# Altium PCB cover1.PcbDoc
Units mil, origin at the board's own origin, x right, y up, seen from the top; angles counter-clockwise.
Board outline 7500 x 2300 mil, 2 copper layers (Top Layer, Bottom Layer); 34 components, 23 nets, 169 pads, 36 vias.
Unrouted connection lines stored in the file: 1.
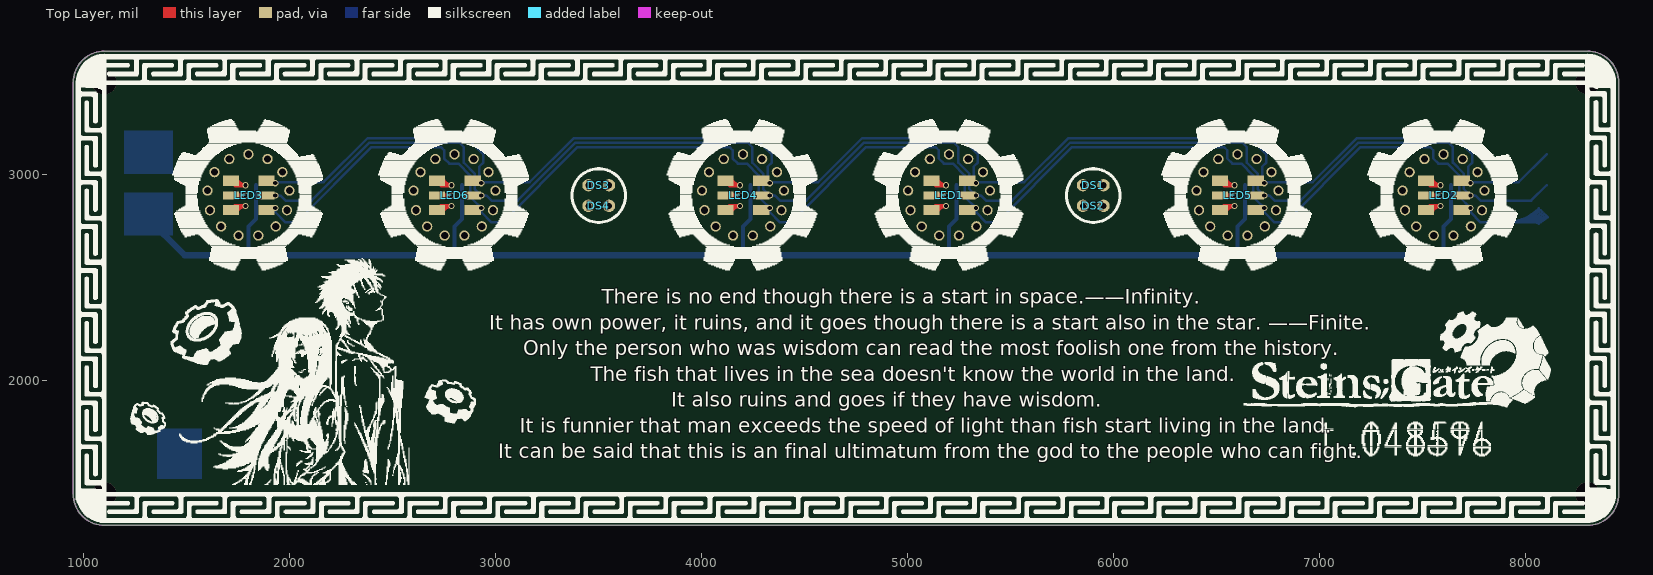
[diagram p0: Top Layer view]
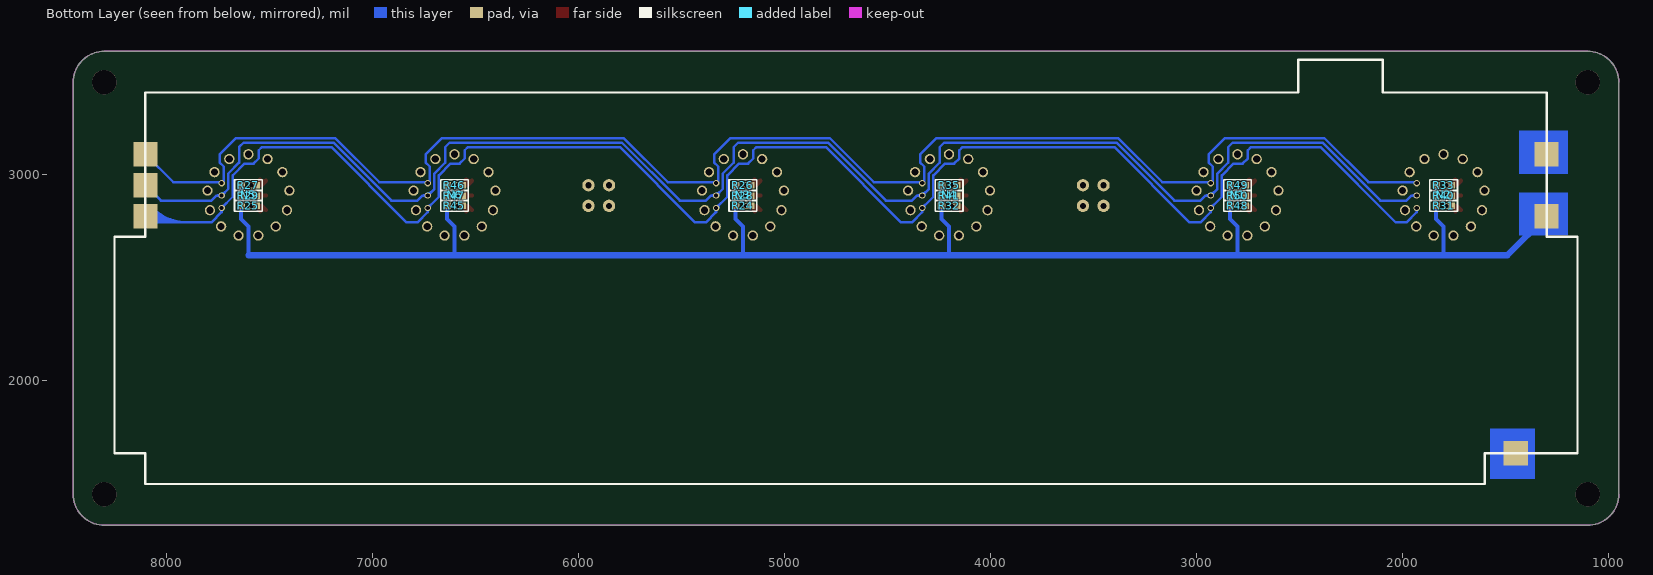
[diagram p1: Bottom Layer view, seen from below]
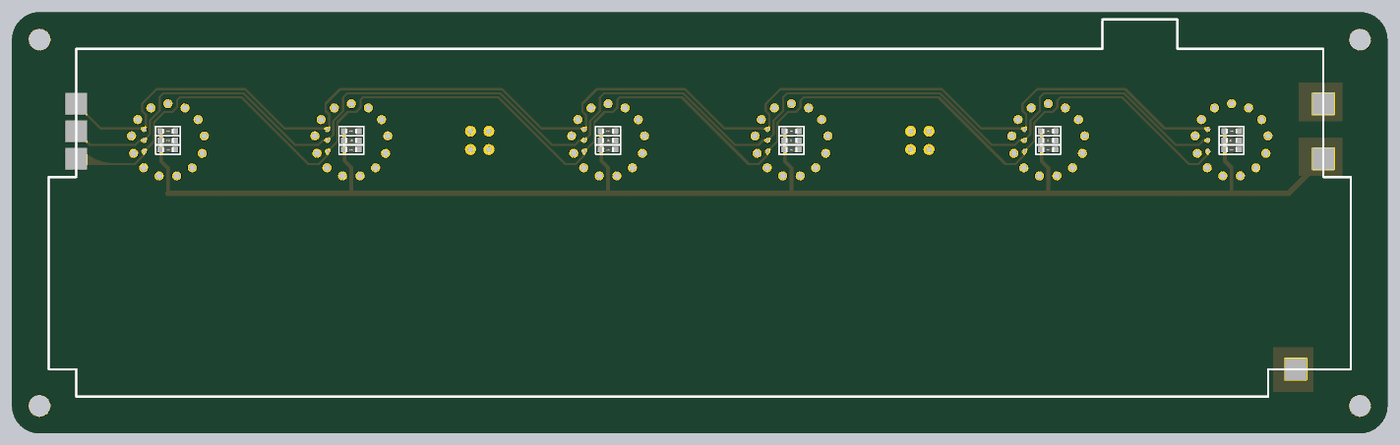
[diagram p2: 3D render of the assembled board from below, using the file's embedded part models]

## Layer stack, top to bottom
Top Solder: solder mask 0.4, Solder Resist, Dk 3.5
Top Layer: signal copper 1.4
Dielectric 1: dielectric 12.6, FR-4, Dk 4.8
Bottom Layer: signal copper 1.4
Bottom Solder: solder mask 0.4, Solder Resist, Dk 3.5

## Board outline
1100,1300 cw(c1100,1450) 950,1450 950,3450 cw(c1100,3450) 1100,3600 8300,3600 cw(c8300,3450) 8450,3450 8450,1450 cw(c8300,1450) 8300,1300

## Design rules (kind name [scope] priority, off if disabled: settings)
Clearance [All] p1: gap=20
PolygonConnect [All] p1: connectstyle=Relief reliefconductorwidth=10 reliefentries=4 polygonreliefangle="90 Angle" airgapwidth=10
RoutingVias [All] p1: holewidth=28 width=50 viastyle="Through Hole" minholewidth=28 minwidth=50 maxholewidth=28 maxwidth=50
SolderMaskExpansion [All] p1: expansion=4
Width [All] p1: maxlimit=100 minlimit=10 preferedwidth=10
29 further rules are at their usual default settings.

## Components (designator, comment, footprint, x,y, rotation, side; value= is the part's Value field where it differs from the comment)
DS1 "Lamp Neon" LED_PIN2 5850,2950 r0 top
DS2 "Lamp Neon" LED_PIN2 5850,2850 r0 top
DS3 "Lamp Neon" LED_PIN2 3550,2950 r180 top
DS4 "Lamp Neon" LED_PIN2 3550,2850 r180 top
LED1 "LED_RGB_5050" LED_RGB_5050 5115,2830 r90 top
LED2 "LED_RGB_5050" LED_RGB_5050 7515,2830 r90 top
LED3 "LED_RGB_5050" LED_RGB_5050 1715,2830 r90 top
LED4 "LED_RGB_5050" LED_RGB_5050 4115,2830 r90 top
LED5 "LED_RGB_5050" LED_RGB_5050 6515,2830 r90 top
LED6 "LED_RGB_5050" LED_RGB_5050 2715,2830 r90 top
N1 "ИН-14" IN14 2800,2900 r0 bottom
N2 "ИН-14" IN14 1800,2900 r0 bottom
N3 "ИН-14" IN14 5200,2900 r0 bottom
N4 "ИН-14" IN14 4200,2900 r0 bottom
N5 "ИН-14" IN14 7600,2900 r0 bottom
N6 "ИН-14" IN14 6600,2900 r0 bottom
R24 "Res2" "R 0603" 5200,2850 r0 bottom
R25 "Res2" "R 0603" 7600,2850 r0 bottom
R26 "Res2" "R 0603" 5200,2950 r0 bottom
R27 "Res2" "R 0603" 7600,2950 r0 bottom
R28 "Res2" "R 0603" 5200,2900 r0 bottom
R29 "Res2" "R 0603" 7600,2900 r0 bottom
R31 "Res2" "R 0603" 1800,2850 r0 bottom
R32 "Res2" "R 0603" 4200,2850 r0 bottom
R33 "Res2" "R 0603" 1800,2950 r0 bottom
R35 "Res2" "R 0603" 4200,2950 r0 bottom
R40 "Res2" "R 0603" 1800,2900 r0 bottom
R41 "Res2" "R 0603" 4200,2900 r0 bottom
R45 "Res2" "R 0603" 6600,2850 r0 bottom
R46 "Res2" "R 0603" 6600,2950 r0 bottom
R47 "Res2" "R 0603" 6600,2900 r0 bottom
R48 "Res2" "R 0603" 2800,2850 r0 bottom
R49 "Res2" "R 0603" 2800,2950 r0 bottom
R50 "Res2" "R 0603" 2800,2900 r0 bottom

## Footprints (in the part's own frame and the unit in brackets; to place one, negate y for a bottom-side part, rotate by r counter-clockwise, add the part's x,y. Pads: shape width x height; smd on the part's side, far side on the other; paste and mask are expansions set on the pad)
IN14 [mil]
  round 50 hole 35: 1(0,-200) 2(-93.03,-177.05) 3(-164.65,-113.54) 4(-198.55,-24.03) 5(-186.98,70.99) 6(-132.58,149.74) 7(-47.81,194.2) 8(47.91,194.18) 9(132.65,149.68) 10(187.01,70.89) 11(198.54,-24.13) 12(164.59,-113.63) 13(92.94,-177.09)
LED_PIN2 [mil] "Photosensitive Diode; 2 Leads"
  round 60 hole 30: 1(0,0) 2(100,0)
LED_RGB_5050 [mm]
  rect 1.27x2 smd: 0(0,0) 1(3.6,0) 3(0,-4.4) 4(3.6,-4.4)
  rect 1x2 smd: 2(1.778,0) 5(1.778,-4.4)
"R 0603" [mil] "1/10W贴片电阻"
  rect 40x31.5 smd: 1(-36.5,0) 2(36.5,0)
  silkscreen extent -68,-26 68,26, body extent -31,-16 31,16, height 16

## Part data
DS1 DS2 DS3 DS4: "Neon Lamp"
R24 R25 R26 R27 R28 R29 R31 R32 R33 R35 R40 R41 R45 R46 R47 R48 R49 R50: "Resistor"

## Free pads (board coordinates)
  round 118.11 hole 118.11: 0(1100,1450) 0(1100,3450) 0(8300,1450) 0(8300,3450)
  rect 118.11x118.11 smd far side: 0(8100,3100) 1(8100,2950) 2(8100,2800) 3(1300,3100) 4(1300,2800) 5(1450,1650)
  rect 118.11x118.11 on Bottom Solder: 5(1450,1650)

## Via types
v1: diameter 30, hole 20, Top Layer to Bottom Layer, 36 vias

## Nets (pads, with @x,y where several pads share a name; then routed paths per layer and width w, separated by ;. In a path a pad name is that pad's centre, name@x,y a point inside that pad or via, vN(x,y) a via of type N, cw(c..) or ccw(c..) an arc to the next point about the centre after c; other vN are vias at no path point)
5V: pad.4 R24.2 R25.2 R26.2 R27.2 R28.2 R29.2 R31.2 R32.2 R33.2 R35.2 R40.2 R41.2 R45.2 R46.2 R47.2 R48.2 R49.2 R50.2 | length 8509.4
  Bottom Layer w20: 1800,2610 1800,2750 1836.5,2786.5 R31.2 R40.2 R33.2 ; 2800,2610 2800,2750 2836.5,2786.5 R48.2 R50.2 R49.2 ; 4200,2610 4200,2750 4236.5,2786.5 R32.2 R41.2 R35.2 ; 5200,2610 5200,2750 5236.5,2786.5 R24.2 R28.2 R26.2 ; 6600,2610 6600,2750 6636.5,2786.5 R45.2 R47.2 R46.2 ; 7600,2610 7600,2750 7636.5,2786.5 R25.2 R29.2 R27.2
  Bottom Layer w30: pad.4 1490,2610 7600,2610
GND: pad.3 pad.5@1450,1650
LED_B: LED1.3 LED2.3 LED3.3 LED4.3 LED5.3 LED6.3 pad.2 | length 10835.3
  Bottom Layer w12: v1(1930,2840) 1930,2820 ; v1@2921,2840.07 ccw(c2899.85,2840.24) 2914.63,2855.37 ; v1@2921,2840.1 ccw(c2900.14,2840.35) 2915.06,2854.93 ccw(c2929.65,2869.86) v1@2929.9,2849 ; v1@2929.93,2849 cw(c2929.76,2870.15) 2914.63,2855.37 ; v1@4321,2840.07 ccw(c4299.85,2840.24) 4314.63,2855.37 ; v1@4321,2840.1 ccw(c4300.14,2840.35) 4315.06,2854.93 ccw(c4329.65,2869.86) v1@4329.9,2849 ; v1@4329.93,2849 cw(c4329.76,2870.15) 4314.63,2855.37 ; v1@5321,2840.07 ccw(c5299.85,2840.24) 5314.63,2855.37 ; v1@5321,2840.1 ccw(c5300.14,2840.35) 5315.06,2854.93 ccw(c5329.65,2869.86) v1@5329.9,2849 ; v1@5329.93,2849 cw(c5329.76,2870.15) 5314.63,2855.37 ; v1@6721,2840.07 ccw(c6699.85,2840.24) 6714.63,2855.37 ; v1@6721,2840.1 ccw(c6700.14,2840.35) 6715.06,2854.93 ccw(c6729.65,2869.86) v1@6729.9,2849 ; v1@6729.93,2849 cw(c6729.76,2870.15) 6714.63,2855.37 ; v1@7721,2840.07 ccw(c7699.85,2840.24) 7714.63,2855.37 ; v1@7721,2840.1 ccw(c7700.14,2840.35) 7715.06,2854.93 ccw(c7729.65,2869.86) v1@7729.9,2849 ; v1@7729.93,2849 cw(c7729.76,2870.15) 7714.63,2855.37 ; 8031.81,2779.65 ccw(c8016.43,2806.28) pad.2@8047.09,2803.98 ; 8033.99,2793.36 ccw(c8017.63,2820.72) pad.2@8048.55,2812.94 ; pad.2 8070,2770 7780,2770 7730,2820 ; 1930,2820 ccw(c1912.28,2820) 1924.03,2833.26 cw(c1912.28,2820) 1930,2820 ; 1930,2820 cw(c1947.72,2820) 1935.97,2833.26 ccw(c1947.72,2820) 1930,2820 ; 1930,2820 1980,2770 2032.23,2770 2397.23,3135 2735,3135 2750,3120 2750,3080 2775,3055 2818.89,3055 2876,2997.89 2876,2894 v1(2930,2840) 2930,2820 ; 2914.64,2855.36 ccw(c2930,2870.73) 2930,2849 cw(c2930,2870.73) 2914.64,2855.36 ; 2914.64,2855.36 cw(c2899.27,2840) 2921,2840 ccw(c2899.27,2840) 2914.64,2855.36 ; 2930,2820 ccw(c2912.28,2820) 2924.03,2833.26 cw(c2912.28,2820) 2930,2820 ; 2930,2820 cw(c2947.72,2820) 2935.97,2833.26 ccw(c2947.72,2820) 2930,2820 ; 2930,2820 2980,2770 3032.23,2770 3397.23,3135 4135,3135 4150,3120 4150,3080 4175,3055 4218.89,3055 4276,2997.89 4276,2894 v1(4330,2840) 4330,2820 ; 4314.64,2855.36 ccw(c4330,2870.73) 4330,2849 cw(c4330,2870.73) 4314.64,2855.36 ; 4314.64,2855.36 cw(c4299.27,2840) 4321,2840 ccw(c4299.27,2840) 4314.64,2855.36 ; 4330,2820 ccw(c4312.28,2820) 4324.03,2833.26 cw(c4312.28,2820) 4330,2820 ; 4330,2820 cw(c4347.72,2820) 4335.97,2833.26 ccw(c4347.72,2820) 4330,2820 ; 4330,2820 4380,2770 4432.23,2770 4797.23,3135 5135,3135 5150,3120 5150,3080 5175,3055 5218.89,3055 5276,2997.89 5276,2894 v1(5330,2840) 5330,2820 ; 5314.64,2855.36 ccw(c5330,2870.73) 5330,2849 cw(c5330,2870.73) 5314.64,2855.36 ; 5314.64,2855.36 cw(c5299.27,2840) 5321,2840 ccw(c5299.27,2840) 5314.64,2855.36 ; 5330,2820 ccw(c5312.28,2820) 5324.03,2833.26 cw(c5312.28,2820) 5330,2820 ; 5330,2820 cw(c5347.72,2820) 5335.97,2833.26 ccw(c5347.72,2820) 5330,2820 ; 5330,2820 5380,2770 5432.23,2770 5797.23,3135 6535,3135 6550,3120 6550,3080 6575,3055 6618.89,3055 6676,2997.89 6676,2894 v1(6730,2840) 6730,2820 ; 6714.64,2855.36 ccw(c6730,2870.73) 6730,2849 cw(c6730,2870.73) 6714.64,2855.36 ; 6714.64,2855.36 cw(c6699.27,2840) 6721,2840 ccw(c6699.27,2840) 6714.64,2855.36 ; 6730,2820 ccw(c6712.28,2820) 6724.03,2833.26 cw(c6712.28,2820) 6730,2820 ; 6730,2820 cw(c6747.72,2820) 6735.97,2833.26 ccw(c6747.72,2820) 6730,2820 ; 6730,2820 6780,2770 6832.23,2770 7197.23,3135 7535,3135 7550,3120 7550,3080 7575,3055 7618.89,3055 7676,2997.89 7676,2894 v1(7730,2840) 7730,2820 ; 7714.64,2855.36 ccw(c7730,2870.73) 7730,2849 cw(c7730,2870.73) 7714.64,2855.36 ; 7714.64,2855.36 cw(c7699.27,2840) 7721,2840 ccw(c7699.27,2840) 7714.64,2855.36 ; 7730,2820 ccw(c7712.28,2820) 7724.03,2833.26 cw(c7712.28,2820) 7730,2820 ; 7730,2820 cw(c7747.72,2820) 7735.97,2833.26 ccw(c7747.72,2820) 7730,2820 ; pad.2@8044.34,2770 ccw(c8044.34,2855.66) 8104.91,2795.09 cw(c8044.34,2855.66) pad.2@8044.34,2770 ; pad.2@8044.34,2770 cw(c8044.34,2744.34) 8062.48,2762.48 ccw(c8044.34,2744.34) pad.2@8044.34,2770 ; 7899.49,2770 ccw(c7899.49,3000.51) 8062.48,2837.52 cw(c7899.49,3000.51) 7899.49,2770 ; 7928.46,2770 ccw(c7928.46,2971.54) 8070.97,2829.03 cw(c7928.46,2971.54) 7928.46,2770 ; 7957.43,2770 ccw(c7957.43,2942.57) 8079.45,2820.55 cw(c7957.43,2942.57) 7957.43,2770 ; 7986.4,2770 ccw(c7986.4,2913.6) 8087.94,2812.06 cw(c7986.4,2913.6) 7986.4,2770 ; 8015.37,2770 ccw(c8015.37,2884.63) 8096.43,2803.57 cw(c8015.37,2884.63) 8015.37,2770
LED_G: LED1.4 LED2.4 LED3.4 LED4.4 LED5.4 LED6.4 pad.0@8100,3100 | length 7635.5
  Bottom Layer w12: v1@1935.13,2965.13 2165.13,2965.13 2379,3179 2861,3179 2940,3100 2940,3060 2920,3040 2920,2970 v1(2930,2960) 2935.13,2965.13 3165.13,2965.13 3379,3179 4261,3179 4340,3100 4340,3060 4320,3040 4320,2970 v1(4330,2960) ; v1@4335.13,2965.13 4565.13,2965.13 4779,3179 5261,3179 5340,3100 5340,3060 5320,3040 5320,2970 v1(5330,2960) 5335.13,2965.13 5565.13,2965.13 5779,3179 6661,3179 6740,3100 6740,3060 6720,3040 6720,2970 v1(6730,2960) ; v1@6735.13,2965.13 6965.13,2965.13 7179,3179 7661,3179 7740,3100 7740,3060 7720,3040 7720,2970 v1(7730,2960) 7735.13,2965.13 7965.13,2965.13 pad.0@8100,3100
  other v1: 1930,2960
LED_R: LED1.5 LED2.5 LED3.5 LED4.5 LED5.5 LED6.5 pad.1 | length 8903.8
  Bottom Layer w12: v1(1930,2900) 1955,2900 1980,2875 2106.11,2875 2388.11,3157 2823,3157 2845,3135 2845,3060 2898,3007 2898,2932 v1(2930,2900) 2955,2900 2980,2875 3106.11,2875 3388.11,3157 4223,3157 4245,3135 4245,3060 4298,3007 4298,2932 v1(4330,2900) 4355,2900 4380,2875 4506.11,2875 4788.11,3157 5223,3157 5245,3135 5245,3060 5298,3007 5298,2932 v1(5330,2900) 5355,2900 5380,2875 5506.11,2875 5788.11,3157 6623,3157 6645,3135 6645,3060 6698,3007 6698,2932 v1(6730,2900) 6755,2900 6780,2875 6906.11,2875 7188.11,3157 7623,3157 7645,3135 7645,3060 7698,3007 7698,2932 v1(7730,2900) 7755,2900 7780,2875 8025,2875 pad.1 ; v1@2921,2900.07 ccw(c2899.85,2900.24) 2914.63,2915.37 ; v1@2921,2900.1 ccw(c2900.14,2900.35) 2915.06,2914.93 ccw(c2929.65,2929.86) v1@2929.9,2909 ; v1@2929.93,2909 cw(c2929.76,2930.15) 2914.63,2915.37 ; v1@4321,2900.07 ccw(c4299.85,2900.24) 4314.63,2915.37 ; v1@4321,2900.1 ccw(c4300.14,2900.35) 4315.06,2914.93 ccw(c4329.65,2929.86) v1@4329.9,2909 ; v1@4329.93,2909 cw(c4329.76,2930.15) 4314.63,2915.37 ; v1@5321,2900.07 ccw(c5299.85,2900.24) 5314.63,2915.37 ; v1@5321,2900.1 ccw(c5300.14,2900.35) 5315.06,2914.93 ccw(c5329.65,2929.86) v1@5329.9,2909 ; v1@5329.93,2909 cw(c5329.76,2930.15) 5314.63,2915.37 ; v1@6721,2900.07 ccw(c6699.85,2900.24) 6714.63,2915.37 ; v1@6721,2900.1 ccw(c6700.14,2900.35) 6715.06,2914.93 ccw(c6729.65,2929.86) v1@6729.9,2909 ; v1@6729.93,2909 cw(c6729.76,2930.15) 6714.63,2915.37 ; v1@7721,2900.07 ccw(c7699.85,2900.24) 7714.63,2915.37 ; v1@7721,2900.1 ccw(c7700.14,2900.35) 7715.06,2914.93 ccw(c7729.65,2929.86) v1@7729.9,2909 ; v1@7729.93,2909 cw(c7729.76,2930.15) 7714.63,2915.37 ; 1951.73,2900 ccw(c1951.73,2878.27) 1936.36,2893.64 cw(c1951.73,2878.27) 1951.73,2900 ; 1951.73,2900 cw(c1951.73,2921.73) 1936.36,2906.36 ccw(c1951.73,2921.73) 1951.73,2900 ; 2914.64,2915.36 ccw(c2930,2930.73) 2930,2909 cw(c2930,2930.73) 2914.64,2915.36 ; 2914.64,2915.36 cw(c2899.27,2900) 2921,2900 ccw(c2899.27,2900) 2914.64,2915.36 ; 2951.73,2900 ccw(c2951.73,2878.27) 2936.36,2893.64 cw(c2951.73,2878.27) 2951.73,2900 ; 2951.73,2900 cw(c2951.73,2921.73) 2936.36,2906.36 ccw(c2951.73,2921.73) 2951.73,2900 ; 4314.64,2915.36 ccw(c4330,2930.73) 4330,2909 cw(c4330,2930.73) 4314.64,2915.36 ; 4314.64,2915.36 cw(c4299.27,2900) 4321,2900 ccw(c4299.27,2900) 4314.64,2915.36 ; 4351.73,2900 ccw(c4351.73,2878.27) 4336.36,2893.64 cw(c4351.73,2878.27) 4351.73,2900 ; 4351.73,2900 cw(c4351.73,2921.73) 4336.36,2906.36 ccw(c4351.73,2921.73) 4351.73,2900 ; 5314.64,2915.36 ccw(c5330,2930.73) 5330,2909 cw(c5330,2930.73) 5314.64,2915.36 ; 5314.64,2915.36 cw(c5299.27,2900) 5321,2900 ccw(c5299.27,2900) 5314.64,2915.36 ; 5351.73,2900 ccw(c5351.73,2878.27) 5336.36,2893.64 cw(c5351.73,2878.27) 5351.73,2900 ; 5351.73,2900 cw(c5351.73,2921.73) 5336.36,2906.36 ccw(c5351.73,2921.73) 5351.73,2900 ; 6714.64,2915.36 ccw(c6730,2930.73) 6730,2909 cw(c6730,2930.73) 6714.64,2915.36 ; 6714.64,2915.36 cw(c6699.27,2900) 6721,2900 ccw(c6699.27,2900) 6714.64,2915.36 ; 6751.73,2900 ccw(c6751.73,2878.27) 6736.36,2893.64 cw(c6751.73,2878.27) 6751.73,2900 ; 6751.73,2900 cw(c6751.73,2921.73) 6736.36,2906.36 ccw(c6751.73,2921.73) 6751.73,2900 ; 7714.64,2915.36 ccw(c7730,2930.73) 7730,2909 cw(c7730,2930.73) 7714.64,2915.36 ; 7714.64,2915.36 cw(c7699.27,2900) 7721,2900 ccw(c7699.27,2900) 7714.64,2915.36 ; 7751.73,2900 ccw(c7751.73,2878.27) 7736.36,2893.64 cw(c7751.73,2878.27) 7751.73,2900 ; 7751.73,2900 cw(c7751.73,2921.73) 7736.36,2906.36 ccw(c7751.73,2921.73) 7751.73,2900
NetLED1_0: LED1.0 R24.1 | length 277.5
  Top Layer w20: LED1.0 5135,2850 v1(5185,2850) ; LED1.0@5138.84,2841.64 ccw(c5148.49,2853.49) 5160.09,2843.54 ; v1(5185,2850) ccw(c5185,2803.29) 5142.89,2823.51 cw(c5185,2803.29) v1(5185,2850) ; LED1.0@5124.86,2832.16 cw(c5153.21,2818.55) 5153.21,2850 ccw(c5153.21,2818.55) LED1.0@5124.86,2832.16
NetLED1_1: LED1.1 R26.1 | length 285.5
  Top Layer w20: LED1.1 5136.73,2950 v1(5185,2950) ; LED1.1@5138.04,2959.49 cw(c5147.3,2946.43) 5159.89,2956.31 ; v1(5185,2950) cw(c5185,2995.49) 5143.16,2977.62 ccw(c5185,2995.49) v1(5185,2950) ; LED1.1@5124.77,2969.77 ccw(c5154.71,2982.55) 5154.71,2950 cw(c5154.71,2982.55) LED1.1@5124.77,2969.77
NetLED1_2: LED1.2 R28.1 | length 143.5
  Top Layer w20: LED1.2 v1(5185,2900) ; 5158.07,2900 ccw(c5158.07,2876.62) 5141.53,2893.15 cw(c5158.07,2876.62) 5158.07,2900 ; 5158.07,2900 cw(c5158.07,2923.38) 5141.53,2906.85 ccw(c5158.07,2923.38) 5158.07,2900
NetLED2_0: LED2.0 R25.1 | length 277.5
  Top Layer w20: LED2.0 7535,2850 v1(7585,2850) ; LED2.0@7538.84,2841.64 ccw(c7548.49,2853.49) 7560.09,2843.54 ; v1(7585,2850) ccw(c7585,2803.29) 7542.89,2823.51 cw(c7585,2803.29) v1(7585,2850) ; LED2.0@7524.86,2832.16 cw(c7553.21,2818.55) 7553.21,2850 ccw(c7553.21,2818.55) LED2.0@7524.86,2832.16
NetLED2_1: LED2.1 R27.1 | length 285.5
  Top Layer w20: LED2.1 7536.73,2950 v1(7585,2950) ; LED2.1@7538.04,2959.49 cw(c7547.3,2946.43) 7559.89,2956.31 ; v1(7585,2950) cw(c7585,2995.49) 7543.16,2977.62 ccw(c7585,2995.49) v1(7585,2950) ; LED2.1@7524.77,2969.77 ccw(c7554.71,2982.55) 7554.71,2950 cw(c7554.71,2982.55) LED2.1@7524.77,2969.77
NetLED2_2: LED2.2 R29.1 | length 143.5
  Top Layer w20: LED2.2 v1(7585,2900) ; 7558.07,2900 ccw(c7558.07,2876.62) 7541.53,2893.15 cw(c7558.07,2876.62) 7558.07,2900 ; 7558.07,2900 cw(c7558.07,2923.38) 7541.53,2906.85 ccw(c7558.07,2923.38) 7558.07,2900
NetLED3_0: LED3.0 R31.1 | length 277.5
  Top Layer w20: LED3.0 1735,2850 v1(1785,2850) ; LED3.0@1738.84,2841.64 ccw(c1748.49,2853.49) 1760.09,2843.54 ; v1(1785,2850) ccw(c1785,2803.29) 1742.89,2823.51 cw(c1785,2803.29) v1(1785,2850) ; LED3.0@1724.86,2832.16 cw(c1753.21,2818.55) 1753.21,2850 ccw(c1753.21,2818.55) LED3.0@1724.86,2832.16
NetLED3_1: LED3.1 R33.1 | length 285.5
  Top Layer w20: LED3.1 1736.73,2950 v1(1785,2950) ; LED3.1@1738.04,2959.49 cw(c1747.3,2946.43) 1759.89,2956.31 ; v1(1785,2950) cw(c1785,2995.49) 1743.16,2977.62 ccw(c1785,2995.49) v1(1785,2950) ; LED3.1@1724.77,2969.77 ccw(c1754.71,2982.55) 1754.71,2950 cw(c1754.71,2982.55) LED3.1@1724.77,2969.77
NetLED3_2: LED3.2 R40.1 | length 143.5
  Top Layer w20: LED3.2 v1(1785,2900) ; 1758.07,2900 ccw(c1758.07,2876.62) 1741.53,2893.15 cw(c1758.07,2876.62) 1758.07,2900 ; 1758.07,2900 cw(c1758.07,2923.38) 1741.53,2906.85 ccw(c1758.07,2923.38) 1758.07,2900
NetLED4_0: LED4.0 R32.1 | length 277.5
  Top Layer w20: LED4.0 4135,2850 v1(4185,2850) ; LED4.0@4138.84,2841.64 ccw(c4148.49,2853.49) 4160.09,2843.54 ; v1(4185,2850) ccw(c4185,2803.29) 4142.89,2823.51 cw(c4185,2803.29) v1(4185,2850) ; LED4.0@4124.86,2832.16 cw(c4153.21,2818.55) 4153.21,2850 ccw(c4153.21,2818.55) LED4.0@4124.86,2832.16
NetLED4_1: LED4.1 R35.1 | length 285.5
  Top Layer w20: LED4.1 4136.73,2950 v1(4185,2950) ; LED4.1@4138.04,2959.49 cw(c4147.3,2946.43) 4159.89,2956.31 ; v1(4185,2950) cw(c4185,2995.49) 4143.16,2977.62 ccw(c4185,2995.49) v1(4185,2950) ; LED4.1@4124.77,2969.77 ccw(c4154.71,2982.55) 4154.71,2950 cw(c4154.71,2982.55) LED4.1@4124.77,2969.77
NetLED4_2: LED4.2 R41.1 | length 143.5
  Top Layer w20: LED4.2 v1(4185,2900) ; 4158.07,2900 ccw(c4158.07,2876.62) 4141.53,2893.15 cw(c4158.07,2876.62) 4158.07,2900 ; 4158.07,2900 cw(c4158.07,2923.38) 4141.53,2906.85 ccw(c4158.07,2923.38) 4158.07,2900
NetLED5_0: LED5.0 R45.1 | length 277.5
  Top Layer w20: LED5.0 6535,2850 v1(6585,2850) ; LED5.0@6538.84,2841.64 ccw(c6548.49,2853.49) 6560.09,2843.54 ; v1(6585,2850) ccw(c6585,2803.29) 6542.89,2823.51 cw(c6585,2803.29) v1(6585,2850) ; LED5.0@6524.86,2832.16 cw(c6553.21,2818.55) 6553.21,2850 ccw(c6553.21,2818.55) LED5.0@6524.86,2832.16
NetLED5_1: LED5.1 R46.1 | length 285.5
  Top Layer w20: LED5.1 6536.73,2950 v1(6585,2950) ; LED5.1@6538.04,2959.49 cw(c6547.3,2946.43) 6559.89,2956.31 ; v1(6585,2950) cw(c6585,2995.49) 6543.16,2977.62 ccw(c6585,2995.49) v1(6585,2950) ; LED5.1@6524.77,2969.77 ccw(c6554.71,2982.55) 6554.71,2950 cw(c6554.71,2982.55) LED5.1@6524.77,2969.77
NetLED5_2: LED5.2 R47.1 | length 143.5
  Top Layer w20: LED5.2 v1(6585,2900) ; 6558.07,2900 ccw(c6558.07,2876.62) 6541.53,2893.15 cw(c6558.07,2876.62) 6558.07,2900 ; 6558.07,2900 cw(c6558.07,2923.38) 6541.53,2906.85 ccw(c6558.07,2923.38) 6558.07,2900
NetLED6_0: LED6.0 R48.1 | length 277.5
  Top Layer w20: LED6.0 2735,2850 v1(2785,2850) ; LED6.0@2738.84,2841.64 ccw(c2748.49,2853.49) 2760.09,2843.54 ; v1(2785,2850) ccw(c2785,2803.29) 2742.89,2823.51 cw(c2785,2803.29) v1(2785,2850) ; LED6.0@2724.86,2832.16 cw(c2753.21,2818.55) 2753.21,2850 ccw(c2753.21,2818.55) LED6.0@2724.86,2832.16
NetLED6_1: LED6.1 R49.1 | length 285.5
  Top Layer w20: LED6.1 2736.73,2950 v1(2785,2950) ; LED6.1@2738.04,2959.49 cw(c2747.3,2946.43) 2759.89,2956.31 ; v1(2785,2950) cw(c2785,2995.49) 2743.16,2977.62 ccw(c2785,2995.49) v1(2785,2950) ; LED6.1@2724.77,2969.77 ccw(c2754.71,2982.55) 2754.71,2950 cw(c2754.71,2982.55) LED6.1@2724.77,2969.77
NetLED6_2: LED6.2 R50.1 | length 143.5
  Top Layer w20: LED6.2 v1(2785,2900) ; 2758.07,2900 ccw(c2758.07,2876.62) 2741.53,2893.15 cw(c2758.07,2876.62) 2758.07,2900 ; 2758.07,2900 cw(c2758.07,2923.38) 2741.53,2906.85 ccw(c2758.07,2923.38) 2758.07,2900
pads on no net: DS1.1 DS1.2 DS2.1 DS2.2 DS3.1 DS3.2 DS4.1 DS4.2 N1.1 N1.2 N1.3 N1.4 N1.5 N1.6 N1.7 N1.8 N1.9 N1.10 N1.11 N1.12 N1.13 N2.1 N2.2 N2.3 N2.4 N2.5 N2.6 N2.7 N2.8 N2.9 N2.10 N2.11 N2.12 N2.13 N3.1 N3.2 N3.3 N3.4 N3.5 N3.6 N3.7 N3.8 N3.9 N3.10 N3.11 N3.12 N3.13 N4.1 N4.2 N4.3 N4.4 N4.5 N4.6 N4.7 N4.8 N4.9 N4.10 N4.11 N4.12 N4.13 N5.1 N5.2 N5.3 N5.4 N5.5 N5.6 N5.7 N5.8 N5.9 N5.10 N5.11 N5.12 N5.13 N6.1 N6.2 N6.3 N6.4 N6.5 N6.6 N6.7 N6.8 N6.9 N6.10 N6.11 N6.12 N6.13

## Keep-outs
Keep-Out Layer:
  lines w5: 950,1450 ccw(c1100,1450) 1100,1300 2500,1300 8300,1300 ccw(c8300,1450) 8450,1450 8450,3450 ccw(c8300,3450) 8300,3600 1100,3600 ccw(c1100,3450) 950,3450 950,1450

## Other copper
Bottom Layer:
  rectangle net 5V: 1195,2705 1435,2915
  rectangle net GND: 1195,3005 1435,3215
  rectangle net GND: 1355,1525 1575,1770

## Silkscreen, mask and mechanical layers (free items; w line width, h text height)
Top Overlay:
  drawing of 18162 lines, arcs and shapes, not listed
  text "There is no end though there is a start in space.——Infinity." at 3515.47,2350 h120
  text "It has own power, it ruins, and it goes though there is a start also in the star. ——Finite." at 2968.44,2225 h120
  text "Only the person who was wisdom can read the most foolish one from the history." at 3134.43,2100 h120
  text "The fish that lives in the sea doesn't know the world in the land." at 3461.08,1975 h120
  text "It also ruins and goes if they have wisdom." at 3851.03,1850 h120
  text "It is funnier that man exceeds the speed of light than fish start living in the land." at 3117.22,1725 h120
  text "It can be said that this is an final ultimatum from the god to the people who can fight." at 3012.35,1600 h120
Bottom Overlay:
  lines w11.81: 8100,2850 8100,3250 ; 8100,3250 8100,3400 2505,3400 2505,3560 2095,3560 2095,3400 1300,3400 1300,2700 1150,2700 1150,1650 1600,1650 1600,1500 8100,1500 8100,1650 8250,1650 8250,2700 8100,2700 8100,3250
Top Solder:
  rectangle: 1100,3585 1100,3595